# Altium PCB Flight_Controller_PCB.PcbDoc (part 1 of 2)
Units mil, origin at the board's own origin, x right, y up, seen from the top; angles counter-clockwise.
Board outline 6000 x 4000 mil, 4 copper layers (Top Layer, PWR, GND, Bottom Layer), stack 23.756 mil thick; 110 components, 96 nets, 505 pads, 5 vias.
Unrouted connection lines stored in the file: 342.
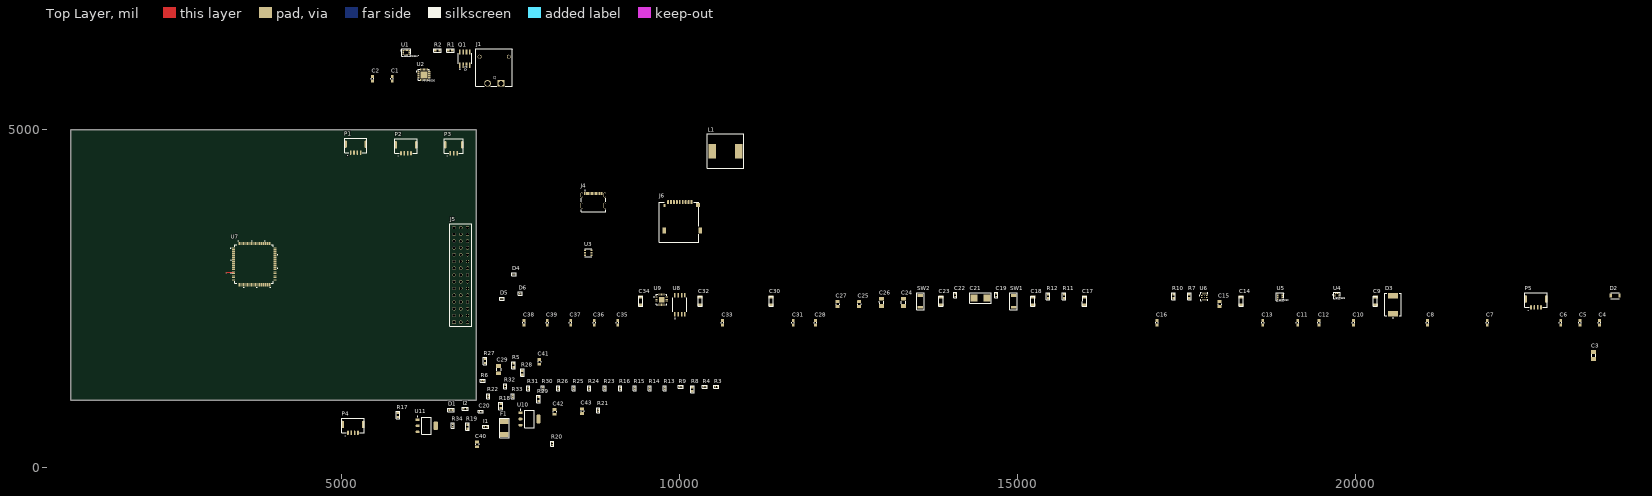
[diagram p0: Top Layer view]
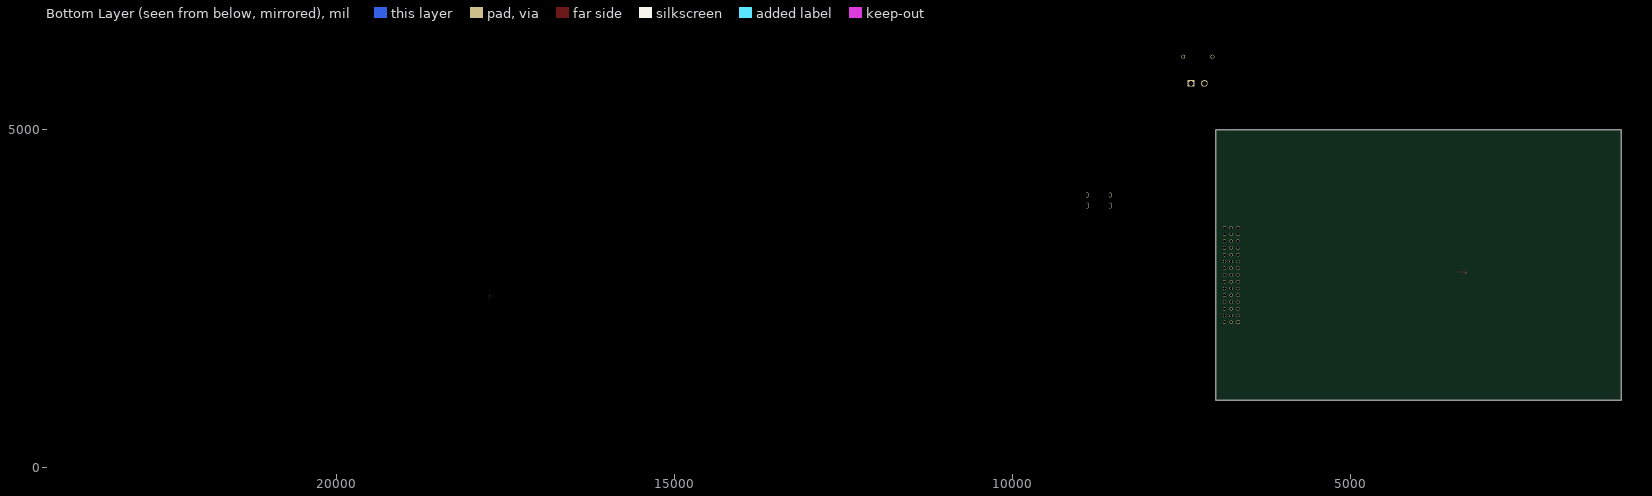
[diagram p1: Bottom Layer view, seen from below]

## Layer stack, top to bottom
Top Solder: solder mask 0.4, Solder Resist, Dk 3.5
Top Layer: signal copper 1.4
Dielectric 2: prepreg 2.8, PP-006, Dk 4.1
PWR: signal copper 1.378
Dielectric 1: dielectric 12.6, FR-4, Dk 4.8
GND: signal copper 1.378
Dielectric 3: prepreg 2.8, PP-006, Dk 4.1
Bottom Layer: signal copper 1.4
Bottom Solder: solder mask 0.4, Solder Resist, Dk 3.5

## Board outline
1000,1000 7000,1000 7000,5000 1000,5000

## Design rules (kind name [scope] priority, off if disabled: settings)
Clearance [All] p1: gap=5 ignorepadtopadclearanceinfootprint=FALSE
DiffPairsRouting [All] p1: maxlimit=10 minlimit=10 mostfreqgap=10 toplayer_minwidth=15 toplayer_maxwidth=15 toplayer_prefwidth=15 midlayer1_minwidth=15 midlayer1_maxwidth=15 midlayer1_prefwidth=15 midlayer2_minwidth=15 midlayer2_maxwidth=15 midlayer2_prefwidth=15 bottomlayer_minwidth=15 bottomlayer_maxwidth=15 bottomlayer_prefwidth=15 maxuncoupledlength=500
PolygonConnect [All] p1: connectstyle=Direct reliefconductorwidth=10 reliefentries=4 polygonreliefangle="90 Angle" airgapwidth=10
RoutingVias [All] p1: holewidth=28 width=50 viastyle="Through Hole" minholewidth=28 minwidth=50 maxholewidth=28 maxwidth=50
SolderMaskExpansion [All] p1: expansion=4 istentingtop=FALSE
SupplyNets "Schematic Supply Nets_3" [InNet('3V3')] p1: voltage=0.000
SupplyNets "Schematic Supply Nets_2" [InNet('GND')] p2: voltage=0.000
SupplyNets "Schematic Supply Nets_1" [InNet('+5V_VBUS1')] p3: voltage=0.000
SupplyNets "Schematic Supply Nets" [InNet('Input')] p4: voltage=0.000
Width [All] p1: maxlimit=118.11 minlimit=10 preferedwidth=10 midlayer1_maxwidth=10 midlayer2_maxwidth=10 minimp=50.000000 maximp=50.000000 favimp=50.000000
29 further rules are at their usual default settings.

## Classes and differential pairs
differential pair class DIFF90: CON1_USB FTDI_USB
differential pair FTDI_USB: +FTDI_USB_P -FTDI_USB_N
differential pair CON1_USB: +CON1_USB_P -CON1_USB_N

## Components (designator, comment, footprint, x,y, rotation, side; value= is the part's Value field where it differs from the comment)
C1 "CAP_100nF" CAP_100nF 5755,5750 r90 top value=100nf
C2 "CAP_100nF" CAP_100nF 5465,5750 r90 top value=100nf
C3 "CAP_10uF" CAP_10uF 23520,1660 r90 top value=10uf
C4 "CAP_0603_10nf" CAP_100nF 23610,2145 r90 top
C5 "CAP_100nF" CAP_100nF 23320,2145 r90 top value=100nf
C6 "CAP_100nF" CAP_100nF 23035,2145 r90 top value=100nf
C7 "CAP_100nF" CAP_100nF 21950,2145 r90 top value=100nf
C8 "CAP_100nF" CAP_100nF 21065,2145 r90 top value=100nf
C9 "CAP_4.7uF" CAP_4.7uF 20295,2465 r90 top value=4.7uF
C10 "CAP_100nF" CAP_100nF 19970,2145 r90 top value=100nf
C11 "CAP_100nF" CAP_100nF 19145,2145 r90 top value=100nf
C12 "CAP_100nF" CAP_100nF 19460,2145 r90 top value=100nf
C13 "CAP_100nF" CAP_100nF 18630,2145 r90 top value=100nf
C14 "CAP_4.7uF" CAP_4.7uF 18310,2465 r90 top value=4.7uF
C15 "CAP_22uF" CAP_22uF 17990,2420 r90 top value=22uF
C16 "=value" CAP_100nF 17065,2145 r90 top
C17 "4.7uF" CAP_4.7uF 15995,2465 r90 top
C18 "CAP_2.2uF" CAP_4.7uF 15230,2465 r90 top value="2.2 uF"
C19 "CAP_22pF" CAP_0402 14690,2550 r90 top value=22pF
C20 "100nF, 50V" CAP_0402 7065,830 r0 top
C21 "25MHz" "XTAL 25 MHZ" 14455,2510 r0 top
C22 "CAP_22pF" CAP_0402 14080,2550 r90 top value=22pF
C23 "CAP_2.2uF" CAP_4.7uF 13870,2465 r90 top value="2.2 uF"
C24 "CAP_10uF" CAP_10uF 13315,2445 r90 top value=10uf
C25 "22uF" CAP_22uF 12660,2420 r90 top
C26 "CAP_10uF" CAP_10uF 12990,2445 r90 top value=10uf
C27 "22uF" CAP_22uF 12340,2420 r90 top
C28 "CAP_100nF" CAP_100nF 12015,2145 r90 top value=100nf
C29 "10uf" CAP_10uF 7330,1450 r90 top
C30 "CAP_4.7uF" CAP_4.7uF 11360,2465 r90 top value=4.7uF
C31 "CAP_100nF" CAP_100nF 11685,2145 r90 top value=100nf
C32 "1uF" CAP_4.7uF 10310,2465 r90 top value="2.2 uF"
C33 "100nF" CAP_100nF 10640,2145 r90 top value=100nf
C34 "CAP_4.7uF" CAP_4.7uF 9430,2465 r90 top value=4.7uF
C35 "CAP_100nF" CAP_100nF 9090,2145 r90 top value=100nf
C36 "CAP_100nF" CAP_100nF 8745,2145 r90 top value=100nf
C37 "CAP_100nF" CAP_100nF 8395,2145 r90 top value=100nf
C38 "CAP_100nF" CAP_100nF 7705,2145 r90 top value=100nf
C39 "CAP_100nF" CAP_100nF 8050,2145 r90 top value=100nf
C40 "22uF" CAP_22uF 7010,345 r90 top
C41 "22uF" CAP_22uF 7930,1565 r90 top
C42 "22uF" CAP_22uF 8155,825.43 r90 top
C43 "22uF" CAP_22uF 8565,835.43 r90 top
D1 "ESD5Z5.0" SOD-523 6625,855 r0 top
D2 "TVS-bidirectional-Diode" SOD-123FL_bi 23840,2545 r0 top
D3 "SS34" DIO_SS34 20555,2410 r90 top
D4 "AQ3045-01ETG" SOD882 7557.8,2860 r0 top
D5 "" SOD882 7380,2500 r0 top
D6 "AQ3045-01ETG" SOD882 7647.8,2575 r0 top
F1 "0451020.MRL" FP-0451-MFG 7415,588.5 r90 top
I1 "Ferrite Beads EMI FILTER" KYOCERA-KNH16-DA 7140,605 r0 top value=25mΩ
I2 "Ferrite Beads EMI FILTER" KYOCERA-KNH16-DA 6835,870 r0 top value=25mΩ
J1 "XT30-M" XT30PW-M 7265,5880 r0 top
J4 "2171790001" USB_C 8730,3920 r0 top
J5 "12 pin 3 rows 2.54 mm header" PGA225x15 6775,2790 r90 top
J6 "Micro SD holder" "Edge Connector" 10094.96,3927.32 r0 top
L1 "22uH" "12.3x12.3 - duplicate" 10685,4680 r0 top
P1 "JST_GH_V4" JST_GH_V4 5215,4874.57 r0 top
P2 "JST_GH_V4" JST_GH_V4 5959.61,4864.57 r0 top
P3 "JST_GH_V3" JST_GH_V3 6665,4865 r0 top
P4 "JST_GH_V4" JST_GH_V4 5175,729.57 r0 top
P5 "JST_GH_V4" JST_GH_V4 22670,2585 r0 top
Q1 "AO4407A" AO4407A 6830,6050 r90 top
R1 "3.9k" RES_3.9K 6615,6170 r0 top
R2 "3.9k" RES_3.9K 6425,6170 r0 top
R3 "0R" RES_SMD_0402 10550,1195 r0 top
R4 "10K" RES_SMD_0402 10380,1195 r0 top value=10kR
R5 "49.9K" RES_SMD_0603 7550,1515 r90 top
R6 "RES_0402_9.2K" RES_SMD_0402 7095,1285 r0 top
R7 "23.7K" RES_SMD_0603 17545,2535 r90 top
R8 "49.9K" RES_SMD_0603 10195,1160 r90 top
R9 "5K1" RES_SMD_0402 10025,1195 r0 top value=5.1kR
R10 "23.7K" RES_SMD_0603 17310,2535 r90 top
R11 "23.7K" RES_SMD_0603 15690,2535 r90 top
R12 "51.1K" RES_SMD_0603 15455,2535 r90 top
R13 "5K1" RES_SMD_0402 9785,1175 r90 top value=5.1kR
R14 "10K" RES_SMD_0402 9565,1175 r90 top value=10kR
R15 "0R" RES_SMD_0402 9345,1175 r90 top
R16 "0R" RES_SMD_0402 9130,1175 r90 top
R17 "49.9K" RES_SMD_0603 5840,779.29 r90 top
R18 "49.9K" RES_SMD_0603 7360,914.29 r90 top
R19 "49.9K" RES_SMD_0603 6870,605.71 r90 top
R20 "10K" RES_SMD_0402 8125,355 r90 top value=10kR
R21 "10K" RES_SMD_0402 8800,850 r90 top value=10kR
R22 "10K" RES_SMD_0402 7175,1057.01 r90 top value=10kR
R23 "0R" RES_SMD_0402 8900,1175 r90 top
R24 "27R" RES_SMD_0402 8670,1175 r90 top
R25 "27R" RES_SMD_0402 8440,1175 r90 top
R26 "0R" RES_SMD_0402 8210,1175 r90 top
R27 "49.9K" RES_SMD_0603 7130,1580 r90 top
R28 "49.9K" RES_SMD_0603 7680,1405 r90 top
R29 "49.9K" RES_SMD_0603 7920,1015.71 r90 top
R30 "10K" RES_SMD_0402 7980,1175 r90 top value=10kR
R31 "4K7" RES_SMD_0402 7770,1175 r90 top value=4.7kR
R32 "5K1" RES_SMD_0402 7425,1202.99 r90 top value=5.1kR
R33 "5K1" RES_SMD_0402 7540,1057.01 r90 top value=5.1kR
R34 "10K" RES_SMD_0402 6650,622.99 r90 top value=10kR
SW1 "PB" PUSH_BUTTON1 14945,2460 r90 top
SW2 "PUSH_BUTTON1" PUSH_BUTTON1 13565,2460 r90 top
U1 "ICM-42688-P" PQFN50P300X250X97-14N 5965,6140 r0 top
U2 "MPU-6000" MPU-6000 6225,5810 r0 top
U3 "AOZ1282CI" AOZ1282CI 8655,3180 r0 top
U4 "BMP388" PQFN50P200X200X80-10N 19725,2545 r0 top
U5 "BMP280" XDCR_BMP280 18885,2530 r0 top
U6 "TPS2121RUXT" FP-RUX0012A-MFG 17765,2530 r0 top
U7 "STM32H753VIT6" LQFP100-14x14mm 3715,3010 r0 top
U8 "flash_memory_128megabits" SOIC-8-208mil 10010,2410 r90 top
U9 "FT231XQ-R" FP-QFN-20-IPC_B 9740,2485 r0 top
U10 "LDO Output 3.3 V" AMS1117 7786.34,720 r0 top
U11 "LDO Output 3.3 V" AMS1117 6265,620 r0 top

## Footprints (in the part's own frame and the unit in brackets; to place one, negate y for a bottom-side part, rotate by r counter-clockwise, add the part's x,y. Pads: shape width x height; smd on the part's side, far side on the other; paste and mask are expansions set on the pad)
"12.3x12.3 - duplicate" [mm]
  rect 2.9x5.4 smd: 1(-4.95,0) 2(4.95,0)
  silkscreen extent -6.86,-6.35 6.86,6.48, body extent -6,-6 6,6, height 5.46
AMS1117 [mm]
  rect 1.604x0.952 smd paste+0 mask+0: 1(-3.395,2.29)
  rrect100% 1.604x0.952 smd paste+0 mask+0: 2(-3.395,0) 3(-3.395,-2.29)
  rrect59% 1.604x3.262 smd paste+0 mask+0: 4(3.395,0)
  silkscreen extent -3.52,-3.25 1.75,3.62, body extent -4.7,-3.75 4.7,3.75, height 0.25
AO4407A [mm]
  rrect25% 1.97x0.6 smd: 1(-2.475,1.905) 2(-2.475,0.635) 3(-2.475,-0.635) 4(-2.475,-1.905) 5(2.475,-1.905) 6(2.475,-0.635) 7(2.475,0.635) 8(2.475,1.905)
  silkscreen extent -4.1,-2.52 2,2.52, body extent -3,-2.45 3,2.45, height 1.75
AOZ1282CI [mm]
  rect 0.8x0.63 smd: 1(-1.2,0.95) 2(-1.2,0) 3(-1.2,-0.95) 4(1.2,-0.95) 5(1.2,0) 6(1.2,0.95)
  silkscreen extent -1.4,-1.55 1.37,1.52, body extent -1.4,-1.46 1.4,1.46, height 1.32
CAP_4.7uF [mm]
  rrect25% 1.24x1.92 smd: 1(-1.49,0) 2(1.49,0)
  silkscreen extent -1.88,-0.78 1.87,0.81, body extent -1.6,-0.78 1.6,0.82, height 0.89
CAP_10uF [mm]
  rect 1.44x1.82 smd: 1(-1.336,0) 2(1.336,0)
  silkscreen extent -0.48,-0.9 0.48,0.91, body extent -1.6,-0.8 1.6,0.8, height 1.9
CAP_22uF [mm]
  rrect25% 1.11x1.47 smd: 1(-0.9,0) 2(0.9,0)
  silkscreen extent -0.19,-0.63 0.18,0.63, body extent -1,-0.63 1,0.63, height 1.45
CAP_100nF [mm]
  rect 1.1x1 smd: 1(-0.85,0) 2(0.85,0)
  silkscreen extent -0.15,-0.45 0.15,0.45, body extent -0.8,-0.4 0.8,0.4, height 0.9
CAP_0402 [mm]
  rect 0.4x0.6 smd: 1(-0.55,0) 2(0.55,0)
  silkscreen extent -1.03,-0.53 1.03,0.53
DIO_SS34 [mm]
  rect 2x3.6 smd paste+0 mask+0.102: A(3.4,0) C(-3.4,0)
  silkscreen extent -5.1,-3.18 4.32,3.18, body extent -3.85,-2.95 4.1,2.95, height 2.65
"Edge Connector" [mm]
  oval 0.7x1.6 smd: 1(2.2,0) 2(1.1,0) 3(0,0) 4(-1.1,0) 5(-2.2,0) 6(-3.3,0) 7(-4.4,0) 8(-5.5,0) 9(-6.6,0)
  rect 0.7x1.2 smd: 10(-8,-1.25)
  rect 1.2x2.2 smd: 11(-8,-10.6) 12(5.5,-10.6)
  rect 1.6x1.5 smd: 13(4.6,-1)
  silkscreen extent -10,-15 5,0
FP-0451-MFG [mil]
  rect 77x124 smd paste+0 mask+0: 1(-96.5,0) 2(96.5,0)
  silkscreen extent -145,-70 145,70, body extent -139,-66 139,66, height 10
FP-QFN-20-IPC_B [mm]
  rect 0.84x0.242 smd paste+0 mask+0: 1(-1.916,1)
  rrect100% 0.84x0.242 smd paste+0 mask+0: 2(-1.916,0.5) 3(-1.916,0) 4(-1.916,-0.5) 5(-1.916,-1) 11(1.916,-1) 12(1.916,-0.5) 13(1.916,0) 14(1.916,0.5) 15(1.916,1)
  rrect100% 0.242x0.84 smd paste+0 mask+0: 6(-1,-1.916) 7(-0.5,-1.916) 8(0,-1.916) 9(0.5,-1.916) 10(1,-1.916) 16(1,1.916) 17(0.5,1.916) 18(0,1.916) 19(-0.5,1.916) 20(-1,1.916)
  rect 2.05x2.05 smd paste-1000 mask+0: 21(0,0)
  silkscreen extent -3.01,-2 2,2, body extent -2.59,-2.59 2.59,2.59, height 0.25
FP-RUX0012A-MFG [mm]
  rrect25% 1.05x0.4 smd paste+0 mask+0: 1(-0.675,0.35) 2(-0.675,-0.35) 7(0.675,-0.35) 8(0.675,0.35)
  rrect50% 0.2x0.6 smd paste+0 mask+0: 3(-0.75,-1.15) 4(-0.25,-1.15) 5(0.25,-1.15) 6(0.75,-1.15) 9(0.75,1.15) 10(0.25,1.15) 11(-0.25,1.15) 12(-0.75,1.15)
  silkscreen extent -1.87,-1.55 1.3,1.55, body extent -1.3,-1.55 1.3,1.55, height 0.25
JST_GH_V3 [mil]
  rrect100% 24x67 smd: 1(-49.21,-214.57) 2(0,-214.57) 3(50,-214.57)
  rrect100% 40x111 smd: GND(-125.98,-90.55) GND(126,-90.55)
  silkscreen extent -140,-215 140,0, body extent -138,-235 138,-40, height 165
JST_GH_V4 [mil]
  rrect100% 24x67 smd: 1(-73.82,-214.57) 2(-24.61,-214.57) 3(25,-214.57) 4(74,-214.57)
  rrect100% 40x111 smd: GND(-150.59,-90.55) GND(151,-90.55)
  silkscreen extent -164,-215 165,0, body extent -162,-235 163,-40, height 165
KYOCERA-KNH16-DA [mil] "KYOCERA-KNH16-DA"
  rect 24x24 smd: 1(-25,0) 2(25,0)
  silkscreen extent -45,-20 45,20, body extent -20,-10 20,10, height 14
LQFP100-14x14mm [mil]
  rect 47x12 smd paste+0 mask+0: 1(-305.12,236.22) 2(-305.12,216.54) 3(-305.12,196.85) 4(-305.12,177.17) 5(-305.12,157.48) 6(-305.12,137.8) 7(-305.12,118.11) 8(-305.12,98.43) 9(-305.12,78.74) 10(-305.12,59.06) 11(-305.12,39.37) 12(-305.12,19.69) 13(-305.12,0) 14(-305.12,-19.68) 15(-305.12,-39.37) 16(-305.12,-59.06) 17(-305.12,-78.74) 18(-305.12,-98.43) 19(-305.12,-118.11) 20(-305.12,-137.8) 21(-305.12,-157.48) 22(-305.12,-177.17) 23(-305.12,-196.85) 24(-305.12,-216.54) 25(-305.12,-236.22) 51(305.12,-236.22) 52(305.12,-216.54) 53(305.12,-196.85) 54(305.12,-177.17) 55(305.12,-157.48) 56(305.12,-137.8) 57(305.12,-118.11) 58(305.12,-98.43) 59(305.12,-78.74) 60(305.12,-59.06) 61(305.12,-39.37) 62(305.12,-19.68) 63(305.12,0) 64(305.12,19.68) 65(305.12,39.37) 66(305.12,59.06) 67(305.12,78.74) 68(305.12,98.43) 69(305.12,118.11) 70(305.12,137.8) 71(305.12,157.48) 72(305.12,177.17) 73(305.12,196.85) 74(305.12,216.54) 75(305.12,236.22)
  rect 12x47 smd paste+0 mask+0: 26(-236.22,-305.12) 27(-216.54,-305.12) 28(-196.85,-305.12) 29(-177.17,-305.12) 30(-157.48,-305.12) 31(-137.8,-305.12) 32(-118.11,-305.12) 33(-98.43,-305.12) 34(-78.74,-305.12) 35(-59.06,-305.12) 36(-39.37,-305.12) 37(-19.68,-305.12) 38(0,-305.12) 39(19.68,-305.12) 40(39.37,-305.12) 41(59.06,-305.12) 42(78.74,-305.12) 43(98.43,-305.12) 44(118.11,-305.12) 45(137.8,-305.12) 46(157.48,-305.12) 47(177.17,-305.12) 48(196.85,-305.12) 49(216.54,-305.12) 50(236.22,-305.12) 76(236.22,305.12) 77(216.54,305.12) 78(196.85,305.12) 79(177.17,305.12) 80(157.48,305.12) 81(137.8,305.12) 82(118.11,305.12) 83(98.43,305.12) 84(78.74,305.12) 85(59.06,305.12) 86(39.37,305.12) 87(19.68,305.12) 88(0,305.12) 89(-19.68,305.12) 90(-39.37,305.12) 91(-59.06,305.12) 92(-78.74,305.12) 93(-98.43,305.12) 94(-118.11,305.12) 95(-137.8,305.12) 96(-157.48,305.12) 97(-177.17,305.12) 98(-196.85,305.12) 99(-216.54,305.12) 100(-236.22,305.12)
  silkscreen extent -351,-349 349,349, body extent -315,-315 315,315, height 63
MPU-6000 [mm] "Accelerometer Gyroscope QFN-24-EP(4x4) Accelerometers RoHS"
  rect 0.8x0.35 smd paste+0 mask+0.05: 1(-2,1.25) 2(-2,0.75) 3(-2,0.25) 4(-2,-0.25) 5(-2,-0.75) 6(-2,-1.25) 13(2,-1.25) 14(2,-0.75) 15(2,-0.25) 16(2,0.25) 17(2,0.75) 18(2,1.25)
  rect 0.35x0.85 smd paste+0 mask+0.05: 7(-1.25,-1.975) 8(-0.75,-1.975) 9(-0.25,-1.975) 10(0.25,-1.975) 11(0.75,-1.975) 12(1.25,-1.975) 19(1.25,1.975) 20(0.75,1.975) 21(0.25,1.975) 22(-0.25,1.975) 23(-0.75,1.975) 24(-1.25,1.975)
  rect 2.743x2.642 smd paste-1.321 mask+0.05: 25(0,0)
  silkscreen extent -2.92,-2.07 2.07,2.07, body extent -2.04,-2.04 2.04,2.04, height 0.94
PGA225x15 [mm]
  rect 1.2x1.2 hole 1: 1(-16.256,2.667)
  round 1.2 hole 1: 2(-13.716,2.667) 3(-11.176,2.667) 4(-8.636,2.667) 5(-6.096,2.667) 6(-3.556,2.667) 7(-1.016,2.667) 8(1.524,2.667) 9(4.064,2.667) 10(6.604,2.667) 11(9.144,2.667) 12(11.684,2.667) 13(14.224,2.667) 14(16.764,2.667) 15(19.304,2.667) 16(-16.256,0.127) 17(-13.716,0.127) 18(-11.176,0.127) 19(-8.636,0.127) 20(-6.096,0.127) 21(-3.556,0.127) 22(-1.016,0.127) 23(1.524,0.127) 24(4.064,0.127) 25(6.604,0.127) 26(9.144,0.127) 27(11.684,0.127) 28(14.224,0.127) 29(16.764,0.127) 30(19.304,0.127) 31(-16.256,-2.413) 32(-13.716,-2.413) 33(-11.176,-2.413) 34(-8.636,-2.413) 35(-6.096,-2.413) 36(-3.556,-2.413) 37(-1.016,-2.413) 38(1.524,-2.413) 39(4.064,-2.413) 40(6.604,-2.413) 41(9.144,-2.413) 42(11.684,-2.413) 43(14.224,-2.413) 44(16.764,-2.413) 45(19.304,-2.413)
  silkscreen extent -17.78,-4.01 20.82,4.19, body extent -17.5,-3.68 20.55,3.94, height 7.68
PQFN50P200X200X80-10N [mm] "30Kpa~1.25bar LGA-10(2x2) Pressure Sensors, Transducers RoHS"
  rrect9% 0.35x0.38 smd mask+0.05: 1(-0.765,0.25) 2(-0.765,-0.25) 3(-0.5,-0.765) 4(0,-0.765) 5(0.5,-0.765) 6(0.765,-0.25) 7(0.765,0.25) 8(0.5,0.765) 9(0,0.765) 10(-0.5,0.765)
  silkscreen extent -1.62,-1.2 1.22,1.17, body extent -1,-1 1,1, height 0.81
PQFN50P300X250X97-14N [mm] "Accelerometer Gyroscope LGA-14(2.5x3) IMUs (Inertial Measurement Units) RoHS3"
  rrect50% 0.59x0.35 smd mask+0: 1(-1.165,0.75) 2(-1.165,0.25) 3(-1.165,-0.25) 4(-1.165,-0.75) 8(1.165,-0.75) 9(1.165,-0.25) 10(1.165,0.25) 11(1.165,0.75)
  rrect50% 0.35x0.59 smd mask+0: 5(-0.5,-0.915) 6(0,-0.915) 7(0.5,-0.915) 12(0.5,0.915) 13(0,0.915) 14(-0.5,0.915)
  silkscreen extent -2.12,-1.4 1.64,1.37, body extent -1.5,-1.28 1.5,1.22, height 0.98
PUSH_BUTTON1 [mm]
  rect 1.05x2 smd: 1(-2.225,0) 2(2.225,0)
  silkscreen extent -3.17,-1.4 3.3,1.4
RES_3.9K [mm]
  rect 0.87x0.93 smd: 1(-0.78,0) 2(0.78,0)
  silkscreen extent -1.4,-0.69 1.4,0.69, body extent -0.8,-0.4 0.8,0.4, height 0.55
RES_SMD_0402 [mm]
  rect 0.54x0.6 smd: 1(-0.432,0) 2(0.432,0)
  silkscreen extent -0.97,-0.56 0.97,0.56, body extent -0.5,-0.25 0.5,0.25, height 0.37
RES_SMD_0603 [mm]
  rect 0.87x0.93 smd: 1(-0.78,0) 2(0.78,0)
  silkscreen extent -1.4,-0.69 1.4,0.69, body extent -0.8,-0.4 0.8,0.4, height 0.55
SOD882 [mm]
  rect 0.35x0.6 smd: 1(-0.325,0) 2(0.325,0)
  silkscreen extent -0.79,-0.58 0.79,0.58, body extent -0.54,-0.34 0.54,0.34, height 0.44
SOD-123FL_bi [mm]
  rrect25% 0.9x1.4 smd: 1(-1.65,0) 2(1.65,0)
  silkscreen extent -1.6,-1.1 1.6,1.1, body extent -1.85,-0.9 1.85,0.9, height 1.3
SOD-523 [mm]
  rect 0.6x0.8 smd: A(-0.55,0) K(0.55,0)
  silkscreen extent -1.14,-0.64 1.14,0.64, body extent -0.85,-0.44 0.85,0.44, height 0.46
SOIC-8-208mil [mm]
  rrect25% 1.61x0.58 smd: 1(-3.605,1.905) 2(-3.605,0.635) 3(-3.605,-0.635) 4(-3.605,-1.905) 5(3.605,-1.905) 6(3.605,-0.635) 7(3.605,0.635) 8(3.605,1.905)
  silkscreen extent -5.31,-2.64 2.64,2.64, body extent -3.95,-2.64 3.95,2.64, height 2.16
USB_C [mm]
  rect 0.6x1.15 smd paste+0 mask+0: 1(-3.2,3.425) 2(-2.4,3.425) 11(2.4,3.425) 12(3.2,3.425)
  rect 0.3x1.15 smd paste+0 mask+0: 3(-1.75,3.425) 4(-1.25,3.425) 5(-0.75,3.425) 6(-0.25,3.425) 7(0.25,3.425) 8(0.75,3.425) 9(1.25,3.425) 10(1.75,3.425)
  rrect100% 1x1.8 hole 1.4 slot 0.6 at 0 deg paste-2539.97 mask+0: S1(-4.32,2.85) S2(4.32,2.85)
  rrect100% 1x2.2 hole 1.8 slot 0.6 at 0 deg paste-2539.97 mask+0: S3(-4.32,-1.15) S4(4.32,-1.15)
  silkscreen extent -4.57,-3.35 4.57,4.7, body extent -4.92,-3.45 4.92,4.1, height 0.25
XDCR_BMP280 [mm] "30Kpa~1.1bar LGA-8(2x2.5) Pressure Sensors, Transducers RoHS"
  rect 0.6x0.5 smd mask+0.05: 1(0.8,0.975) 2(0.8,0.325) 3(0.8,-0.325) 4(0.8,-0.975) 5(-0.8,-0.975) 6(-0.8,-0.325) 7(-0.8,0.325) 8(-0.8,0.975)
  silkscreen extent -1.35,-1.5 1.78,1.5, body extent -1,-1.25 1,1.25, height 1.01
XT30PW-M [mm]
  rect 2.5x2.5 hole 1.9: 1(2.5,-5)
  round 2.5 hole 1.9: 2(-2.5,-5)
  round 1.5 hole 1.2: ""(-5.5,5) ""(5.5,5)
  silkscreen extent -6.9,-6.1 6.7,8, body extent -6.75,-6 6.55,7.95, height 5.3
"XTAL 25 MHZ" [mm]
  rect 2.5x2.6 smd: 1(-2.45,0) 2(2.45,0)
  silkscreen extent -4.06,-2 4.06,2, body extent -4.2,-5 1.8,-3.6, height 1.75

## Part data
C1 C2 C5 C6 C7 C8 C10 C11 C12 C13 C28 C31 C35 C36 C37 C38 C39: "CAP 100nF 50V X7R ±10% 0603 Ceramic Capacitors RoHS", Manufacturer=YAGEO, Manufacturer Part Number=CC0603KRX7R9BB104, Supplier Part Number=C14663, ComponentLink1Description=Datasheet, ComponentLink1URL=https://www.lcsc.com/datasheet/C14663.pdf, Supplier=LCSC
C3 C24 C26: "CAP 10uF X7R ±10% 1206 Ceramic Capacitors RoHS", Manufacturer=TDK, Manufacturer Part Number=CGA5L1X7R1E106K160AC, Supplier Part Number=C2168260, ComponentLink1Description=Datasheet, ComponentLink1URL=https://www.lcsc.com/datasheet/C2168260.pdf, Supplier=LCSC
C4: "10nF ±10% 50V Ceramic Capacitor X7R 0603", ComponentLink1Description=datasheet, ComponentLink1URL=https://www.lcsc.com/product-detail/C100042.html?s_z=n_capacitor%2520%252010nf
C9 C14 C30 C34: "CAP  4.7uF 25V X7R ±10% 1206 Ceramic Capacitors RoHS", Manufacturer=FH, Manufacturer Part Number=1206B475K250NT, Supplier Part Number=C132148, ComponentLink1Description=Datasheet, ComponentLink1URL=https://www.lcsc.com/product-detail/C132148.html?s_z=n_FH%25201206B475K250N, Supplier=LCSC
C15: "CAP 22uF 25V X5R ±20% 0805 Ceramic Capacitors RoHS", Manufacturer="Samsung Electro-Mechanics", Manufacturer Part Number=CL21A226MAYNNNE, Supplier Part Number=C602037, ComponentLink1Description=Datasheet, ComponentLink1URL=https://www.lcsc.com/datasheet/C602037.pdf, Supplier=LCSC
C16: library part CAP_0603_10nf, "10nF ±10% 50V Ceramic Capacitor X7R 0603", ComponentLink1Description=datasheet, ComponentLink1URL=https://www.lcsc.com/product-detail/C100042.html?s_z=n_capacitor%2520%252010nf
C17: library part CAP_4.7uF, "CAP  4.7uF 25V X7R ±10% 1206 Ceramic Capacitors RoHS", Manufacturer=FH, Manufacturer Part Number=1206B475K250NT, Supplier Part Number=C132148, ComponentLink1Description=Datasheet, ComponentLink1URL=https://www.lcsc.com/product-detail/C132148.html?s_z=n_FH%25201206B475K250N, Supplier=LCSC
C18 C23: "CAP  2.2uF 25V X7R ±10% 1206 Ceramic Capacitors RoHS", Manufacturer=FH, Manufacturer Part Number=1206B475K250NT, Supplier Part Number=C132148, ComponentLink1Description=Datasheet, ComponentLink1URL=https://www.lcsc.com/product-detail/C132148.html?s_z=n_FH%25201206B475K250N, Supplier=LCSC
C19 C22: "50V 22pF C0G ±5% 0402 Multilayer Ceramic Capacitors MLCC - SMD/SMT ROHS,CAP CER 22pF 50V C0G 0402", Case Code (Imperial)=0402, Case Code (Metric)=1005, Dielectric=C0G, Dielectric Material=Ceramic, Manufacturer=Murata, Manufacturer Lifecycle Status=NRND, Manufacturer Part Number=GRM1555C1H220JA01D, Max Operating Temperature=125°C, Min Operating Temperature=-55°C, Tolerance=5%, Voltage=50V, Case/Package=0402, Category="Ceramic Capacitors", ComponentLink1Description=https://datasheet.octopart.com:443/GRM1555C1H220JA01D-Murata-datasheet-141913788.pdf?src-supplier=Upverter, ComponentLink1URL=https://datasheet.octopart.com:443/GRM1555C1H220JA01D-Murata-datasheet-141913788.pdf?src-supplier=Upverter, ComponentLink2Description=https://datasheet.octopart.com:443/GRM1555C1H220JA01D-Murata-datasheet-12559435.pdf?src-supplier=element14+APAC, ComponentLink2URL=https://datasheet.octopart.com:443/GRM1555C1H220JA01D-Murata-datasheet-12559435.pdf?src-supplier=element14+APAC, ComponentLink3Description=https://datasheet.octopart.com:443/GRM1555C1H220JA01D-Murata-datasheet-62317060.pdf?src-supplier=element14+APAC, ComponentLink3URL=https://datasheet.octopart.com:443/GRM1555C1H220JA01D-Murata-datasheet-62317060.pdf?src-supplier=element14+APAC, ComponentLink4Description=https://datasheet.octopart.com:443/GRM1555C1H220JA01D-Murata-datasheet-141266224.pdf?src-supplier=Ciiva, ComponentLink4URL=https://datasheet.octopart.com:443/GRM1555C1H220JA01D-Murata-datasheet-141266224.pdf?src-supplier=Ciiva, ComponentLink5Description=https://datasheet.octopart.com:443/GRM1555C1H220JA01D-Murata-datasheet-140681354.pdf?src-supplier=Ciiva, ComponentLink5URL=https://datasheet.octopart.com:443/GRM1555C1H220JA01D-Murata-datasheet-140681354.pdf?src-supplier=Ciiva, ComponentLink6Description=https://datasheet.octopart.com:443/GRM1555C1H220JA01D-Murata-datasheet-138739516.pdf?src-supplier=Ciiva, ComponentLink6URL=https://datasheet.octopart.com:443/GRM1555C1H220JA01D-Murata-datasheet-138739516.pdf?src-supplier=Ciiva, ComponentLink7Description=https://datasheet.octopart.com:443/GRM1555C1H220JA01D-Murata-datasheet-120101189.pdf?src-supplier=Megastar, ComponentLink7URL=https://datasheet.octopart.com:443/GRM1555C1H220JA01D-Murata-datasheet-120101189.pdf?src-supplier=Megastar, ComponentLink8Description=https://datasheet.octopart.com:443/GRM1555C1H220JA01D-Murata-datasheet-81455556.pdf?src-supplier=TME, ComponentLink8URL=https://datasheet.octopart.com:443/GRM1555C1H220JA01D-Murata-datasheet-81455556.pdf?src-supplier=TME, ComponentLink9Description=https://datasheet.octopart.com:443/GRM1555C1H220JA01D-Murata-datasheet-22122223.pdf?src-supplier=Future+Electronics, ComponentLink9URL=https://datasheet.octopart.com:443/GRM1555C1H220JA01D-Murata-datasheet-22122223.pdf?src-supplier=Future+Electronics, ComponentLink10Description=https://datasheet.octopart.com:443/GRM1555C1H220JA01D-Murata-datasheet-12510170.pdf?src-supplier=Future+Electronics, ComponentLink10URL=https://datasheet.octopart.com:443/GRM1555C1H220JA01D-Murata-datasheet-12510170.pdf?src-supplier=Future+Electronics, ComponentLink11Description=https://datasheet.octopart.com:443/GRM1555C1H220JA01D-Murata-datasheet-8517407.pdf?src-supplier=Future+Electronics, ComponentLink11URL=https://datasheet.octopart.com:443/GRM1555C1H220JA01D-Murata-datasheet-8517407.pdf?src-supplier=Future+Electronics, ComponentLink12Description=https://datasheet.octopart.com:443/GRM1555C1H220JA01D-Murata-datasheet-8387045.pdf?src-supplier=Future+Electronics, ComponentLink12URL=https://datasheet.octopart.com:443/GRM1555C1H220JA01D-Murata-datasheet-8387045.pdf?src-supplier=Future+Electronics, ComponentLink13Description=https://datasheet.octopart.com:443/GRM1555C1H220JA01D-Murata-datasheet-8324201.pdf?src-supplier=Future+Electronics, ComponentLink13URL=https://datasheet.octopart.com:443/GRM1555C1H220JA01D-Murata-datasheet-8324201.pdf?src-supplier=Future+Electronics, ComponentLink14Description=https://datasheet.octopart.com:443/GRM1555C1H220JA01D-Murata-datasheet-7628724.pdf?src-supplier=Future+Electronics, ComponentLink14URL=https://datasheet.octopart.com:443/GRM1555C1H220JA01D-Murata-datasheet-7628724.pdf?src-supplier=Future+Electronics, ComponentLink15Description=https://datasheet.octopart.com:443/GRM1555C1H220JA01D-Murata-datasheet-552801.pdf?src-supplier=Future+Electronics, ComponentLink15URL=https://datasheet.octopart.com:443/GRM1555C1H220JA01D-Murata-datasheet-552801.pdf?src-supplier=Future+Electronics, ComponentLink16Description=https://datasheet.octopart.com:443/GRM1555C1H220JA01D-Murata-datasheet-44781475.pdf?src-supplier=Future+Electronics, ComponentLink16URL=https://datasheet.octopart.com:443/GRM1555C1H220JA01D-Murata-datasheet-44781475.pdf?src-supplier=Future+Electronics, ComponentLink17Description=https://datasheet.octopart.com/GRM1555C1H220JA01D-Murata-datasheet-12515295.pdf, ComponentLink17URL=https://datasheet.octopart.com/GRM1555C1H220JA01D-Murata-datasheet-12515295.pdf, ComponentLink18Description=https://datasheet.octopart.com/GRM1555C1H220JA01D-Murata-datasheet-12510076.pdf, ComponentLink18URL=https://datasheet.octopart.com/GRM1555C1H220JA01D-Murata-datasheet-12510076.pdf, ComponentLink19Description=https://datasheet.octopart.com/GRM1555C1H220JA01D-Murata-datasheet-11978611.pdf, ComponentLink19URL=https://datasheet.octopart.com/GRM1555C1H220JA01D-Murata-datasheet-11978611.pdf, ComponentLink20Description=https://datasheet.octopart.com/GRM1555C1H220JA01D-Murata-datasheet-10025737.pdf, ComponentLink20URL=https://datasheet.octopart.com/GRM1555C1H220JA01D-Murata-datasheet-10025737.pdf, ComponentLink21Description=https://datasheet.octopart.com/GRM1555C1H220JA01D-Murata-datasheet-8819587.pdf, ComponentLink21URL=https://datasheet.octopart.com/GRM1555C1H220JA01D-Murata-datasheet-8819587.pdf, ComponentLink22Description=https://datasheet.octopart.com/GRM1555C1H220JA01D-Murata-datasheet-14396388.pdf, ComponentLink22URL=https://datasheet.octopart.com/GRM1555C1H220JA01D-Murata-datasheet-14396388.pdf, ComponentLink23Description=http://sigma.octopart.com:80/reach_statement/Murata-company-16.pdf?src-supplier=Compliance+Statements, ComponentLink23URL=http://sigma.octopart.com:80/reach_statement/Murata-company-16.pdf?src-supplier=Compliance+Statements, Depth=500µm, Height=500µm, Lead Free="Lead Free", Length=1mm, Lifecycle Status=NRND, Material=Ceramic, Mounting Technology="Surface Mount", Number of Terminals=2, Packaging="Cut Tape", Pricing="30000=0.0031 (USD)", Radiation Hardening=No, REACH SVHC=Yes, RoHS=Compliant, Schedule B="8532240020, 8532240020|8532240020|8532240020|8532240020|8532240020", Stock=1320000, Supplier="Arrow Electronics", Supplier Part Number=GRM1555C1H220JA01D, Termination=SMD/SMT, Thickness=500µm, Voltage Rating=50V, Voltage Rating (DC)=50V, Width=500µm
C20: library part CAP_0402_0.1UF, "CAP CER 0.1UF 50V X7R 0402", Capacitor Type=Ceramic, LCSC Part Number=C307331, Manufacturer="Samsung Electro-Mechanics", Manufacturer Part Number=CL05B104KB54PNC, Category="Ceramic Capacitors", ComponentLink1Description=https://datasheet.ciiva.com:443/pdfs/VipMasterIC/IC/SEMS/SEMS-S-A0006318249/SEMS-S-A0006320959-1.pdf?src-supplier=IHS+Markit, ComponentLink1URL=https://datasheet.ciiva.com:443/pdfs/VipMasterIC/IC/SEMS/SEMS-S-A0006318249/SEMS-S-A0006320959-1.pdf?src-supplier=IHS+Markit, ComponentLink2Description=https://datasheet.octopart.com/CL05B104KB54PNC-Samsung-datasheet-8326407.pdf?src-supplier=TME, ComponentLink2URL=https://datasheet.octopart.com/CL05B104KB54PNC-Samsung-datasheet-8326407.pdf?src-supplier=TME, Dielectric Material=Ceramic, Pins=2, Pricing="1=0.1, 10=0.044, 50=0.025, 100=0.0194, 500=0.0146, 1000=0.01147, 2500=0.01043, 5000=0.00959 (USD)", Reach SVHC Compliant=Yes, RoHS=Yes, RoHS Compliant=Yes, Stock=1237875, Supplier=LCSC, Supplier Part Number=C307331
C21: library part E3SB25E001803E, "Crystal 25.0000MHZ 12PF SMD", Manufacturer="Hosonic Electronic", Supplier Part Number=3186-E3SB25E001803ECT-ND, Category=Crystals, Manufacturer Part Number=E3SB25E001803E, Pricing="1=0.34, 10=0.299, 25=0.2824, 50=0.2706, 100=0.2595, 250=0.24536, 500=0.23522, 1000=0.22549 (USD)", Stock=2953, Supplier=DigiKey
C25 C27 C40 C41 C42 C43: library part CAP_22uF, "CAP 22uF 25V X5R ±20% 0805 Ceramic Capacitors RoHS", Manufacturer="Samsung Electro-Mechanics", Manufacturer Part Number=CL21A226MAYNNNE, Supplier Part Number=C602037, ComponentLink1Description=Datasheet, ComponentLink1URL=https://www.lcsc.com/datasheet/C602037.pdf, Supplier=LCSC
C29: library part CAP_10uF, "CAP 10uF X7R ±10% 1206 Ceramic Capacitors RoHS", Manufacturer=TDK, Manufacturer Part Number=CGA5L1X7R1E106K160AC, Supplier Part Number=C2168260, ComponentLink1Description=Datasheet, ComponentLink1URL=https://www.lcsc.com/datasheet/C2168260.pdf, Supplier=LCSC
C32: library part CAP_1uF, "CAP  1uF 25V X7R ±10% 1206 Ceramic Capacitors RoHS", Manufacturer=FH, Manufacturer Part Number=1206B475K250NT, Supplier Part Number=C132148, ComponentLink1Description=Datasheet, ComponentLink1URL=https://www.lcsc.com/product-detail/C132148.html?s_z=n_FH%25201206B475K250N, Supplier=LCSC
C33: library part CAP_100nF, "CAP 100nF 50V X7R ±10% 0603 Ceramic Capacitors RoHS", Manufacturer=YAGEO, Manufacturer Part Number=CC0603KRX7R9BB104, Supplier Part Number=C14663, ComponentLink1Description=Datasheet, ComponentLink1URL=https://www.lcsc.com/datasheet/C14663.pdf, Supplier=LCSC
D1: "SOD-523 ESD Protection Devices ROHS", Manufacturer=Anbon, Supplier Part Number=C397782, Category=Uncategorized, Manufacturer Part Number=ESD5Z5.0, Pricing="20=0.0229, 200=0.018, 600=0.0153, 3000=0.012, 9000=0.0106, 21000=0.0099 (USD)", Stock=3000, Supplier=LCSC
D2: "48.4VC Clamp 4.1A Ipp TVS DIODE SOD-123F", Manufacturer=Littelfuse, Manufacturer Part Number=SMF30CA, Supplier Part Number=C3720992, Supplier=LCSC
D3: library part Schottky_40v_3A, "Rectifier Diode, Schottky, 1 Phase, 1 Element, 3A, 40V V(RRM), Silicon, DO-214AB", Average Rectified Current=3A, Case/Package=SMC, Forward Voltage=500mV, Manufacturer=Vishay, Manufacturer Part Number=SS34-E3/9AT, Max Forward Surge Current (Ifsm)=100A, Max Junction Temperature (Tj)=150°C, Max Repetitive Reverse Voltage (Vrrm)=40V, Max Reverse Leakage Current=500µA, Min Operating Temperature=-55°C, Supplier Part Number=SS34-E3/9ATGICT-ND, Category="Rectifier Diodes", China RoHS=Non-Compliant, ComponentLink1Description=https://datasheet.octopart.com:443/SS34-E3-9AT-Vishay-datasheet-181475108.pdf?src-supplier=IHS, ComponentLink1URL=https://datasheet.octopart.com:443/SS34-E3-9AT-Vishay-datasheet-181475108.pdf?src-supplier=IHS, ComponentLink2Description=https://datasheet.octopart.com:443/SS34-E3-9AT-Vishay-datasheet-138899081.pdf?src-supplier=Upverter, ComponentLink2URL=https://datasheet.octopart.com:443/SS34-E3-9AT-Vishay-datasheet-138899081.pdf?src-supplier=Upverter, ComponentLink3Description=https://datasheet.octopart.com:443/SS34-E3-9AT-Vishay-datasheet-188933186.pdf?src-supplier=TME, ComponentLink3URL=https://datasheet.octopart.com:443/SS34-E3-9AT-Vishay-datasheet-188933186.pdf?src-supplier=TME, ComponentLink4Description=https://datasheet.octopart.com:443/SS34-E3-9AT-Vishay-datasheet-15599040.pdf?src-supplier=Future+Electronics, ComponentLink4URL=https://datasheet.octopart.com:443/SS34-E3-9AT-Vishay-datasheet-15599040.pdf?src-supplier=Future+Electronics, ComponentLink5Description=https://datasheet.octopart.com:443/SS34-E3/9AT-Vishay-datasheet-11610764.pdf?src-supplier=Arrow+Electronics, ComponentLink5URL=https://datasheet.octopart.com:443/SS34-E3/9AT-Vishay-datasheet-11610764.pdf?src-supplier=Arrow+Electronics, ComponentLink6Description=http://sigma.octopart.com:80/rohs_statement/Vishay-company-15.pdf?src-supplier=Compliance+Statements, ComponentLink6URL=http://sigma.octopart.com:80/rohs_statement/Vishay-company-15.pdf?src-supplier=Compliance+Statements, Element Configuration=Single, Forward Current=3A, Height=2.62mm, Lifecycle Status=Production, Max Operating Temperature=150°C, Max Output current=3A, Max Reverse Voltage (DC)=40V, Max Surge Current=100A, Mounting Technology="Surface Mount", Number of Elements=1, Number of Terminals=2, Peak Non-Repetitive Surge Current=100A, Peak Reverse Current=500µA, Pins=2, Pricing="1=0.78, 10=0.459, 100=0.3295, 500=0.25386, 1000=0.22717 (USD)", Radiation Hardening=No, REACH SVHC=No, Reverse Standoff Voltage=40V, Reverse Voltage=40V, RoHS=Compliant, Schedule B="8541100080, 8541100080|8541100080|8541100080|8541100080|8541100080", Stock=17685, Supplier=DigiKey
D4 D6: "TVS DIODE 5.3VWM 12VC SOD882", LCSC Part Number=C3710326, Manufacturer=Littelfuse, Max Breakdown Voltage=9V, Max Operating Temperature=150°C, Min Breakdown Voltage=6.8V, Min Operating Temperature=-55°C, Non-rep Peak Rev Power Dis-Max=40W, Package Body Material=Plastic, Package Shape=Rectangular, Package Style="CHIP CARRIERMeter", Rep Pk Reverse Voltage-Max=5.3V, Supplier Part Number=F9321CT-ND, Category="TVS Diodes", ComponentLink1Description=https://datasheet.ciiva.com:443/pdfs/VipMasterIC/IC/LFSI/LFSI-S-A0007892042/LFSI-S-A0007892042-1.pdf?src-supplier=IHS+Markit, ComponentLink1URL=https://datasheet.ciiva.com:443/pdfs/VipMasterIC/IC/LFSI/LFSI-S-A0007892042/LFSI-S-A0007892042-1.pdf?src-supplier=IHS+Markit, ComponentLink2Description=https://www.littelfuse.com/~/media/electronics/datasheets/tvs_diode_arrays/littelfuse_tvs_diode_array_aq3045_datasheet.pdf.pdf?src-supplier=Digikey, ComponentLink2URL=https://www.littelfuse.com/~/media/electronics/datasheets/tvs_diode_arrays/littelfuse_tvs_diode_array_aq3045_datasheet.pdf.pdf?src-supplier=Digikey, ComponentLink3Description=http://www.littelfuse.com/~/media/electronics/datasheets/tvs_diode_arrays/littelfuse_tvs_diode_array_aq3045_datasheet.pdf.pdf?src-supplier=Digikey, ComponentLink3URL=http://www.littelfuse.com/~/media/electronics/datasheets/tvs_diode_arrays/littelfuse_tvs_diode_array_aq3045_datasheet.pdf.pdf?src-supplier=Digikey, Diode Element Material=SILICON, Diode Type="TRANS VOLTAGE SUPPRESSOR", Manufacturer Part Number=AQ3045-01ETG, Number of Elements=1, Pins=2, Polarity=Bidirectional, Pricing="1=0.5, 10=0.391, 100=0.2344, 500=0.217, 1000=0.14756, 2000=0.13585, 5000=0.1302 (USD)", Reach SVHC Compliant=Yes, Reference Standard=AEC-Q101, RoHS=Yes, RoHS Compliant=Yes, Stock=21664, Supplier=Digikey, Surface Mount=Yes, Technology=AVALANCHE, Terminal Form="No Lead", Terminal Position=BOTTOM
D5: library part AQ3045-01ETG, "TVS DIODE 5.3VWM 12VC SOD882", LCSC Part Number=C3710326, Manufacturer=Littelfuse, Max Breakdown Voltage=9V, Max Operating Temperature=150°C, Min Breakdown Voltage=6.8V, Min Operating Temperature=-55°C, Non-rep Peak Rev Power Dis-Max=40W, Package Body Material=Plastic, Package Shape=Rectangular, Package Style="CHIP CARRIERMeter", Rep Pk Reverse Voltage-Max=5.3V, Supplier Part Number=F9321CT-ND, Category="TVS Diodes", ComponentLink1Description=https://datasheet.ciiva.com:443/pdfs/VipMasterIC/IC/LFSI/LFSI-S-A0007892042/LFSI-S-A0007892042-1.pdf?src-supplier=IHS+Markit, ComponentLink1URL=https://datasheet.ciiva.com:443/pdfs/VipMasterIC/IC/LFSI/LFSI-S-A0007892042/LFSI-S-A0007892042-1.pdf?src-supplier=IHS+Markit, ComponentLink2Description=https://www.littelfuse.com/~/media/electronics/datasheets/tvs_diode_arrays/littelfuse_tvs_diode_array_aq3045_datasheet.pdf.pdf?src-supplier=Digikey, ComponentLink2URL=https://www.littelfuse.com/~/media/electronics/datasheets/tvs_diode_arrays/littelfuse_tvs_diode_array_aq3045_datasheet.pdf.pdf?src-supplier=Digikey, ComponentLink3Description=http://www.littelfuse.com/~/media/electronics/datasheets/tvs_diode_arrays/littelfuse_tvs_diode_array_aq3045_datasheet.pdf.pdf?src-supplier=Digikey, ComponentLink3URL=http://www.littelfuse.com/~/media/electronics/datasheets/tvs_diode_arrays/littelfuse_tvs_diode_array_aq3045_datasheet.pdf.pdf?src-supplier=Digikey, Diode Element Material=SILICON, Diode Type="TRANS VOLTAGE SUPPRESSOR", Manufacturer Part Number=AQ3045-01ETG, Number of Elements=1, Pins=2, Polarity=Bidirectional, Pricing="1=0.5, 10=0.391, 100=0.2344, 500=0.217, 1000=0.14756, 2000=0.13585, 5000=0.1302 (USD)", Reach SVHC Compliant=Yes, Reference Standard=AEC-Q101, RoHS=Yes, RoHS Compliant=Yes, Stock=21664, Supplier=Digikey, Surface Mount=Yes, Technology=AVALANCHE, Terminal Form="No Lead", Terminal Position=BOTTOM
F1: "125V 3A 2410 Fuses RoHS", Fuse Current=3A, Fuse Interrupt Ac Current=50A, LCSC Part=C13982, Manufacturer=Littelfuse, Max Fuse Ac Voltage=125V, Package=0451, Supplier Part Number=C178980, Temperature="-55°C to +125°C", Temperature Range High=+125°C, Temperature Range Low=-55°C, Category=Fuse, ComponentLink2Description=Datasheet, ComponentLink2URL=https://www.littelfuse.com/~/media/electronics/datasheets/fuses/littelfuse_fuse_451_453_datasheet.pdf.pdf, Datasheet Link=https://www.lcsc.com/datasheet/C178980.pdf, Device Class L1="Circuit Protection", Device Class L2=Fuses, Device Class L3=unset, Digikey Description="FUSE BRD MNT 3A 125VAC/VDC 2SMD", Fuse Blow Speed=Fast, Fuse I2T=1.65A2Sec, Fuse Interrupt Dc Current=50A, Height=2.94mm, LCSC Link=https://www.lcsc.com/product-detail/C13982.html?s_z=n_0451003.MRL, Lead Free=Yes, Manufacturer Part Number=0451020.MRL, Max Fuse Dc Voltage=125V, Mouser Description="Surface Mount Fuses 125V 3A", Octopart=https://octopart.com/0451003.mrl-littelfuse-566380, Supplier=LCSC, Voltage Rating=125V
I1 I2: library part BLM18SG121TN1D, "Ferrite Beads Multi-Layer 120Ohm 25% 10Kyocera KNH16C104DA5TS EMI filter0MHz 3A 0.025Ohm DCR 0603 T/R", Case Code (Imperial)=0603, Case Code (Metric)=1608, Clock Frequency=100MHz, Current Rating=1A, DC Resistance (DCR)=25mΩ, Manufacturer=Murata, Max Current Rating=3A, Max Operating Temperature=125°C, Min Operating Temperature=-55°C, Supplier Part Number=C107332, Tolerance=25%, Case/Package=0603, Category="Ferrite Beads and Chips", ComponentLink1Description=https://datasheet.octopart.com:443/BLM18SG121TN1D-Murata-datasheet-180806579.pdf?src-supplier=IHS, ComponentLink1URL=https://datasheet.octopart.com:443/BLM18SG121TN1D-Murata-datasheet-180806579.pdf?src-supplier=IHS, ComponentLink2Description=https://datasheet.octopart.com:443/BLM18SG121TN1D-Murata-datasheet-37129980.pdf?src-supplier=element14+APAC, ComponentLink2URL=https://datasheet.octopart.com:443/BLM18SG121TN1D-Murata-datasheet-37129980.pdf?src-supplier=element14+APAC, ComponentLink3Description=https://datasheet.octopart.com:443/BLM18SG121TN1D-Murata-datasheet-168152.pdf?src-supplier=element14+APAC, ComponentLink3URL=https://datasheet.octopart.com:443/BLM18SG121TN1D-Murata-datasheet-168152.pdf?src-supplier=element14+APAC, ComponentLink4Description=https://datasheet.octopart.com:443/BLM18SG121TN1D-Murata-datasheet-11549175.pdf?src-supplier=_legacy+Avnet, ComponentLink4URL=https://datasheet.octopart.com:443/BLM18SG121TN1D-Murata-datasheet-11549175.pdf?src-supplier=_legacy+Avnet, ComponentLink5Description=https://datasheet.octopart.com:443/BLM18SG121TN1D-Murata-datasheet-55943.pdf?src-supplier=DigiKey, ComponentLink5URL=https://datasheet.octopart.com:443/BLM18SG121TN1D-Murata-datasheet-55943.pdf?src-supplier=DigiKey, ComponentLink6Description=https://datasheet.octopart.com:443/BLM18SG121TN1D-Murata-datasheet-141258064.pdf?src-supplier=Ciiva, ComponentLink6URL=https://datasheet.octopart.com:443/BLM18SG121TN1D-Murata-datasheet-141258064.pdf?src-supplier=Ciiva, ComponentLink7Description=https://datasheet.octopart.com:443/BLM18SG121TN1D-Murata-datasheet-138707216.pdf?src-supplier=Ciiva, ComponentLink7URL=https://datasheet.octopart.com:443/BLM18SG121TN1D-Murata-datasheet-138707216.pdf?src-supplier=Ciiva, ComponentLink8Description=https://datasheet.octopart.com:443/BLM18SG121TN1D-Murata-datasheet-135086704.pdf?src-supplier=TME, ComponentLink8URL=https://datasheet.octopart.com:443/BLM18SG121TN1D-Murata-datasheet-135086704.pdf?src-supplier=TME, ComponentLink9Description=https://datasheet.octopart.com:443/BLM18SG121TN1D-Murata-datasheet-62086350.pdf?src-supplier=Future+Electronics, ComponentLink9URL=https://datasheet.octopart.com:443/BLM18SG121TN1D-Murata-datasheet-62086350.pdf?src-supplier=Future+Electronics, ComponentLink10Description=https://datasheet.octopart.com:443/BLM18SG121TN1D-Murata-datasheet-12522583.pdf?src-supplier=Newark, ComponentLink10URL=https://datasheet.octopart.com:443/BLM18SG121TN1D-Murata-datasheet-12522583.pdf?src-supplier=Newark, ComponentLink11Description=https://datasheet.octopart.com:443/BLM18SG121TN1D-Murata-datasheet-10083551.pdf?src-supplier=Newark, ComponentLink11URL=https://datasheet.octopart.com:443/BLM18SG121TN1D-Murata-datasheet-10083551.pdf?src-supplier=Newark, ComponentLink12Description=https://datasheet.octopart.com:443/BLM18SG121TN1D-Murata-datasheet-8508678.pdf?src-supplier=Newark, ComponentLink12URL=https://datasheet.octopart.com:443/BLM18SG121TN1D-Murata-datasheet-8508678.pdf?src-supplier=Newark, ComponentLink13Description=http://sigma.octopart.com:80/reach_statement/Murata-company-16.pdf?src-supplier=Compliance+Statements, ComponentLink13URL=http://sigma.octopart.com:80/reach_statement/Murata-company-16.pdf?src-supplier=Compliance+Statements, Contact Plating=Tin, Core Material=Ferrite, Depth=800µm, ESR=25mΩ, Frequency=100MHz, Height=500µm, Impedance=120Ω, Lead Free="Lead Free", Length=1.6mm, Lifecycle Status=Production, Manufacturer Part Number=BLM18SG121TN1D, Material="Ferrite, Steel", Max DC Current=3A, Number of Circuits=1, Number of Lines=1, Number of Terminals=2, Packaging="Cut Tape", Pins=2, Pricing="10000=0.0271 (USD)", REACH SVHC=Yes, RMS Current (Irms)=3A, RoHS=Compliant, Schedule B="8504500000, 8504500000|8504500000|8504500000|8504500000|8504500000", Shielding=Unshielded, Stock=330000, Supplier="Arrow Electronics", Termination=SMD/SMT, Test Frequency=100MHz, Width=800µm
J1: library part XT30PW-M, Manufacturer="Changzhou Amass Elec", Manufacturer Part Number=XT30U-M, Supplier Part Number=C99101, Datasheet Link=https://www.lcsc.com/datasheet/C99101.pdf, Supplier=LCSC
J4: library part USB_C, "USB Connector, USB Type C, USB 2.0, Receptacle, 16 Ways, Surface Mount, Through Hole Mount", Contact Resistance=50mΩ, Current Rating=1.25A, Dielectric Material=Polyamide, Insulation Resistance=100MΩ, LCSC NUMBER=C3197684, Manufacturer=Molex, Manufacturer Part Number=217179-0001, Max Operating Temperature=85°C, Min Operating Temperature=-40°C, Voltage Rating=30V, Category="USB Connectors", ComponentLink1Description=https://datasheet.octopart.com:443/217179-0001-Molex-datasheet-158871109.pdf?src-supplier=ODG+(Origin+Data+Global), ComponentLink1URL=https://datasheet.octopart.com:443/217179-0001-Molex-datasheet-158871109.pdf?src-supplier=ODG+(Origin+Data+Global), ComponentLink2Description=https://sigma.octopart.com:443/158871110/technical_drawing/Molex-217179-0001.pdf?src-supplier=Upverter, ComponentLink2URL=https://sigma.octopart.com:443/158871110/technical_drawing/Molex-217179-0001.pdf?src-supplier=Upverter, ComponentLink3Description=https://datasheet.octopart.com:443/217179-0001-Molex-datasheet-164573281.pdf?src-supplier=RS+(Formerly+Allied+Electronics), ComponentLink3URL=https://datasheet.octopart.com:443/217179-0001-Molex-datasheet-164573281.pdf?src-supplier=RS+(Formerly+Allied+Electronics), ComponentLink4Description=http://sigma.octopart.com:80/reach_statement/Molex-company-74.pdf?src-supplier=Compliance+Statements, ComponentLink4URL=http://sigma.octopart.com:80/reach_statement/Molex-company-74.pdf?src-supplier=Compliance+Statements, ComponentLink5Description=http://sigma.octopart.com:80/rohs_statement/Molex-company-73.pdf?src-supplier=Compliance+Statements, ComponentLink5URL=http://sigma.octopart.com:80/rohs_statement/Molex-company-73.pdf?src-supplier=Compliance+Statements, ComponentLink6Description=http://sigma.octopart.com:80/conflict_mineral_statement/Molex-company-72.pdf?src-supplier=Compliance+Statements, ComponentLink6URL=http://sigma.octopart.com:80/conflict_mineral_statement/Molex-company-72.pdf?src-supplier=Compliance+Statements, Contact Gender=Female, Contact Material="Gold, Nickel", Gender=Receptacle, Height=3.36mm, Lifecycle Status=Production, Number of Contacts=16, Number of Ports=1, Number of Rows=1, Pins=16, Pricing="1=0.6714, 10=0.617, 25=0.573, 50=0.562, 100=0.534, 250=0.511, 500=0.477, 1200=0.432, 2400=0.399 (USD)", REACH SVHC=Yes, RoHS=Compliant, Shell Finish=Nickel, Shell Material="Stainless Steel", Stock=3219, Supplier=LCSC, Supplier Part Number=C3197684, Terminal Pitch=500µm, USB Standard="USB 2.0"
J5: library part servo_pwr_rail_1, "Pin Header, Board-to-Board, 2.54 mm, 3 Rows, 45 Contacts, Through Hole Right Angle, TSW Series", Housing Color=Black, Manufacturer=Samtec, Manufacturer Lifecycle Status=PRODUCTION, Manufacturer Part Number=TSW-115-08-G-T-RA, Max Current Rating=7.6A, Max Operating Temperature=125°C, Max Voltage Rating (AC)=450V, Min Operating Temperature=-55°C, Supplier Part Number=C374878, Category="Headers and Wire Housings", ComponentLink1Description=https://sigma.octopart.com:443/97325577/technical_drawing/Samtec-TSW-115-08-G-T-RA.pdf?src-supplier=Samtec, ComponentLink1URL=https://sigma.octopart.com:443/97325577/technical_drawing/Samtec-TSW-115-08-G-T-RA.pdf?src-supplier=Samtec, ComponentLink2Description=https://datasheet.octopart.com:443/TSW-115-08-G-T-RA-Samtec-datasheet-150856372.pdf?src-supplier=Electro+Sonic, ComponentLink2URL=https://datasheet.octopart.com:443/TSW-115-08-G-T-RA-Samtec-datasheet-150856372.pdf?src-supplier=Electro+Sonic, ComponentLink3Description=https://datasheet.octopart.com:443/TSW-115-08-G-T-RA-Samtec-datasheet-136646178.pdf?src-supplier=Electro+Sonic, ComponentLink3URL=https://datasheet.octopart.com:443/TSW-115-08-G-T-RA-Samtec-datasheet-136646178.pdf?src-supplier=Electro+Sonic, ComponentLink4Description=https://datasheet.octopart.com:443/TSW-115-08-G-T-RA-Samtec-datasheet-62107121.pdf?src-supplier=Farnell, ComponentLink4URL=https://datasheet.octopart.com:443/TSW-115-08-G-T-RA-Samtec-datasheet-62107121.pdf?src-supplier=Farnell, ComponentLink5Description=https://datasheet.octopart.com:443/TSW-115-08-G-T-RA-Samtec-datasheet-180258786.pdf?src-supplier=JRH+Electronics, ComponentLink5URL=https://datasheet.octopart.com:443/TSW-115-08-G-T-RA-Samtec-datasheet-180258786.pdf?src-supplier=JRH+Electronics, ComponentLink6Description=https://datasheet.octopart.com:443/TSW-115-08-G-T-RA-Samtec-datasheet-151455181.pdf?src-supplier=Sager+Electronics, ComponentLink6URL=https://datasheet.octopart.com:443/TSW-115-08-G-T-RA-Samtec-datasheet-151455181.pdf?src-supplier=Sager+Electronics, ComponentLink7Description=https://datasheet.octopart.com/TSW-115-08-G-T-RA-Samtec-datasheet-86818365.pdf, ComponentLink7URL=https://datasheet.octopart.com/TSW-115-08-G-T-RA-Samtec-datasheet-86818365.pdf, ComponentLink8Description=https://datasheet.octopart.com:443/TSW-115-08-G-T-RA-Samtec-datasheet-11047283.pdf?src-supplier=Newark, ComponentLink8URL=https://datasheet.octopart.com:443/TSW-115-08-G-T-RA-Samtec-datasheet-11047283.pdf?src-supplier=Newark, Contact Material=Bronze, Contact Plating="Gold, Tin", Depth=14.98mm, Gender=Male, Housing Material=Polyester, Lead Pitch=2.54mm, Length=38.1mm, Lifecycle Status=Production, Number of Contacts=45, Number of Rows=3, Orientation="Right Angle", Packaging=Bulk, Pitch=2.54mm, Pricing="1=61.0933, 1=6.6606, 1=7.6558, 1=55.8108, 10=52.5507, 10=5.7293, 10=48.0069, 10=6.5853, 30=5.1613, 30=47.3414, 30=43.248, 30=5.9325, 100=39.256, 100=4.6849, 100=42.9715, 100=5.3849 (HKD)", REACH SVHC=No, RoHS=Compliant, Stock=30, Supplier=LCSC, Termination=Solder
J6: library part "TF-CARD H1.8 SY", "-40⊥~+70⊥ 2mm Gold Card Slot MicroSD card (TF card) Copper alloy Self-bouncing SMD SD Card / Memory Card Connector ROHS", Manufacturer="SHOU HAN", Supplier Part Number=C7529391, Category="Memory Cards", Manufacturer Part Number="TF-CARD H1.8 SY", Pricing="10=0.483, 10=0.4412, 10=0.0606, 10=0.0528, 100=0.3471, 100=0.0476, 100=0.3799, 100=0.0415, 300=0.3291, 300=0.3006, 300=0.036, 300=0.0413, 1000=0.273, 1000=0.0326, 1000=0.0375, 1000=0.2988, 5000=0.2677, 5000=0.0293, 5000=0.2446, 5000=0.0336, 10000=0.2526, 10000=0.2307, 10000=0.0276, 10000=0.0317 (HKD)", Stock=12390, Supplier=LCSC
L1: library part IND_12.3_22uH, "22uH Magnetic Shielded Inductor 7A SMD,12.3x12.3mm Fixed Inductors RoHS"
P1 P2 P4 P5: "BM04B-GHS-TBT", Supplier Part Number 1=455-1580-2-ND, Supplier 1=Digi-Key
P3: "BM03B-GHS-TBT", Supplier Part Number 1=455-1579-2-ND, Supplier 1=Digi-Key
Q1: "3.1W 38mΩ@5V,10A SOIC-8 Single FETs, MOSFETs RoHS", LCSC Part=C16072, Package=SOIC-8, LCSC Link=https://www.lcsc.com/product-detail/C16072.html?s_z=n_AO4407A, MP=AO4407A, SnapEDA_Link=https://www.snapeda.com/parts/AO4407A/Alpha/view-part/?ref=snap
R1 R2: library part RES_0603_3.9K, "Resistor, / 100mW 3.9kΩ 75V ±100ppm/℃ Thick Film Resistor ±1% 0603 Chip Resistor - Surface Mount RoHS", Manufacturer=UNI-ROYAL, Manufacturer Part Number=0603WAF3901T5E, Supplier Part Number=C23018, ComponentLink1Description=Datasheet, ComponentLink1URL=https://www.lcsc.com/datasheet/C23018.pdf, Supplier=LCSC